# EAGLE board 50mil_5x2_JTAG_to_100mil_5_wire_v10 (EAGLE 7.1.0)
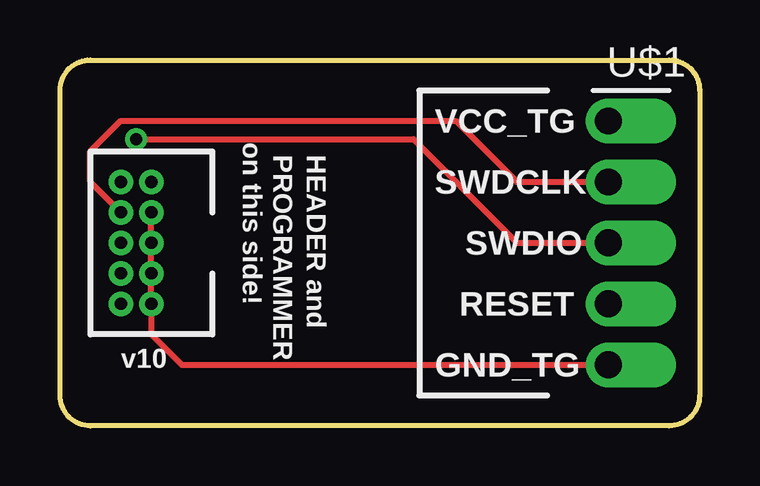
[diagram p0: board, top side]
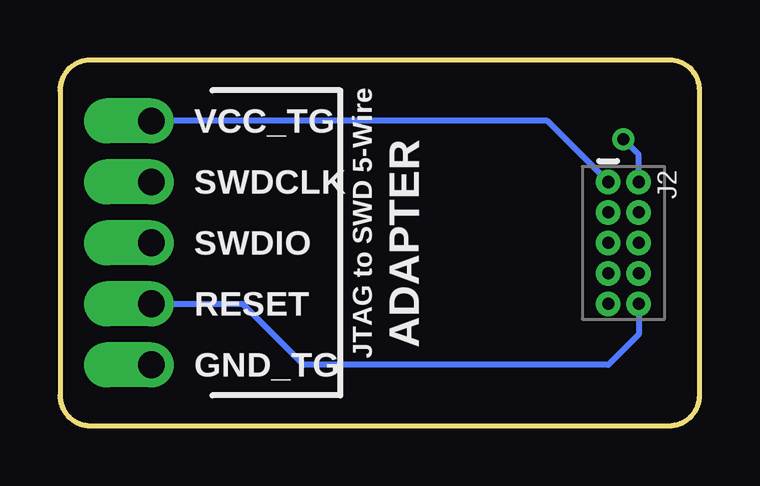
[diagram p1: board, bottom side, seen from below]

Size 26.67 x 15.24 mm. Coordinates in mm from the lower left corner, seen from the top.
Outline: 0,13.97 arc-90 1.27,15.24 25.4,15.24 arc-90 26.67,13.97 26.67,1.27 arc-90 25.4,0 1.27,0 arc-90 0,1.27 0,13.97
Copper layers (1*16): Top 0.035mm / dielectric 1.5mm / Bottom 0.035mm
Design rules "default": minimum track width 10mil, minimum drill 0.6mm, track to track 8mil, track to pad 8mil, pad to pad 8mil, via to via 8mil, smd to smd 8mil, copper to edge 40mil, drill to drill 8mil, minimum pad ring 10mil, minimum via ring 8mil, stop-mask expansion 4mil, vias tented up to drill 0mil, thermal gap 10mil

## Footprints (pad centres in the part's own frame; a part is rotated, then mirrored left to right if it is on the bottom)
2X5-PTH-1.27MM = drill 0.508 pad 1: 1 -2.54,-0.635; 2 -2.54,0.635; 3 -1.27,-0.635; 4 -1.27,0.635; 5 0,-0.635; 6 0,0.635; 7 1.27,-0.635; 8 1.27,0.635; 9 2.54,-0.635; 10 2.54,0.635
1X05_SWD_5_WIRE = drill 1.118 pad 1.88 offset: 1 0,0; 2 0,-2.54; 3 0,-5.08; 4 0,-7.62; 5 0,-10.16

## Placement (x,y rotation side)
J2  CORTEX_DEBUGPTH  [2X5-PTH-1.27MM]  3.17,7.62 270 bottom
U$1  M05-SWD  [1X05_SWD_5_WIRE]  22.86,12.7 0 top

## Library data of the parts
J2 = SparkFun-Connectors
U$1 = Testing

## Nets
GND_TG: J2.3 J2.5 J2.7 J2.9 U$1.5
RESET: J2.10 U$1.4
SWDCLK: J2.4 U$1.2
SWDIO: J2.2 U$1.3
VCC_TG: J2.1 U$1.1

## Tracks (layer width: path | path; a pad name or v marks a point on that pad's centre or on a via)
GND_TG
  Top 0.254: J2.3 J2.5 J2.7 J2.9 3.81,3.81 5.08,2.54 U$1.5
RESET
  Bottom 0.254: J2.10 2.54,3.81 3.81,2.54 16.51,2.54 19.05,5.08 U$1.4
SWDCLK
  Top 0.254: J2.4 1.27,10.16 1.27,11.43 2.54,12.7 16.51,12.7 19.05,10.16 U$1.2
SWDIO  (via drill 0.51)
  Top 0.254: v3.17,11.94 14.73,11.94 19.05,7.62 U$1.3
  Bottom 0.254: J2.2 2.54,11.3 v3.17,11.94
VCC_TG
  Bottom 0.254: J2.1 6.35,12.7 U$1.1

## Text on the board
tPlace: on this side! | VCC_TG | PROGRAMMER | HEADER and | SWDCLK | SWDIO | RESET | v10 | GND_TG
bPlace: JTAG to SWD 5-Wire | ADAPTER | VCC_TG | SWDCLK | SWDIO | RESET | GND_TG